# Altium PCB Thrust-Layout.PcbDoc
Units mm, origin at the board's own origin, x right, y up, seen from the top; angles counter-clockwise.
Board outline 97.1 x 65.85 mm, 2 copper layers (Top Layer, Bottom Layer); 48 components, 32 nets, 163 pads, 107 vias.
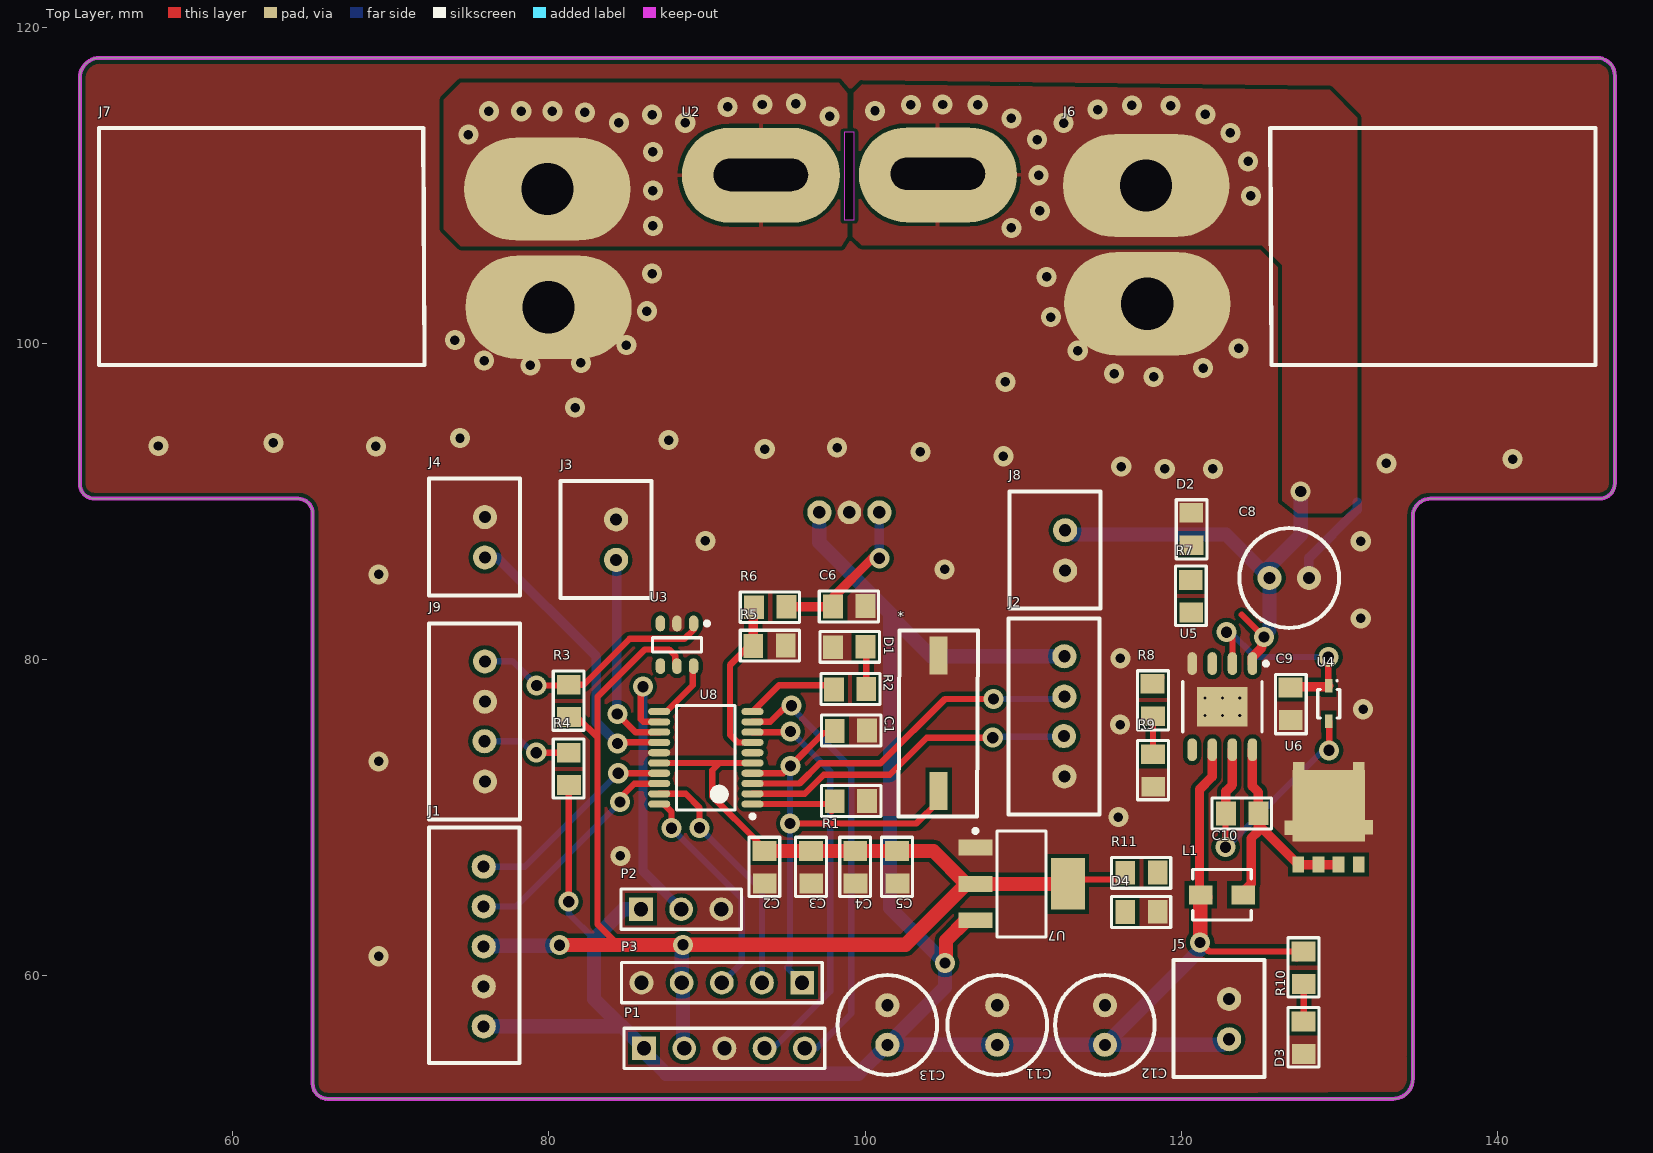
[diagram p0: Top Layer view]
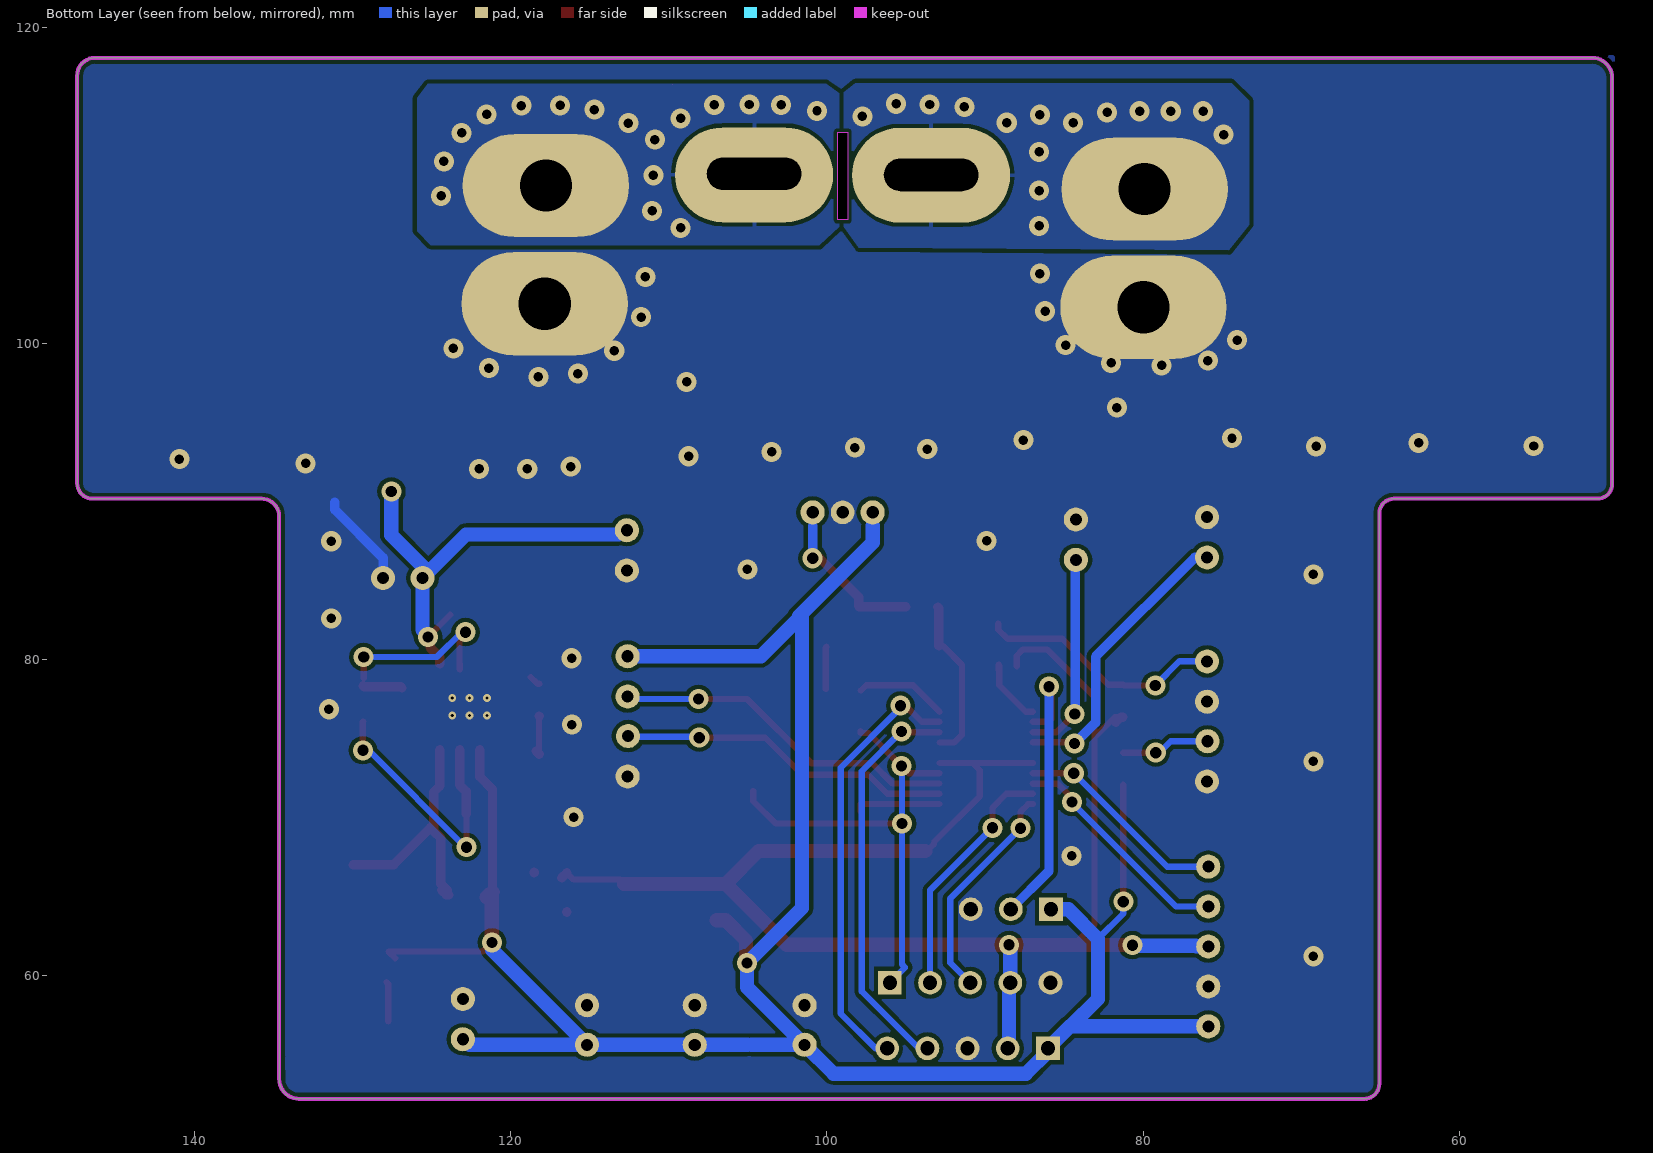
[diagram p1: Bottom Layer view, seen from below]

## Layer stack, top to bottom
Top Solder: solder mask 0.0102, Solder Resist, Dk 3.5
Top Layer: signal copper 0.0356
Dielectric 1: dielectric 0.32, FR-4, Dk 4.8
Bottom Layer: signal copper 0.0356
Bottom Solder: solder mask 0.0102, Solder Resist, Dk 3.5

## Board outline
65.05,53.175 ccw(c66.025,53.175) 66.025,52.2 133.38,52.2 ccw(c133.38,53.47) 134.65,53.47 134.65,54.918 ccw(c134.64,54.918) 134.64,54.928 134.64,89.04 cw(c135.765,89.04) 135.765,90.165 146.44,90.165 ccw(c146.44,91.15) 147.425,91.15 147.425,116.925 ccw(c146.3,116.925) 146.3,118.05 51.595,118.05 ccw(c51.595,116.78) 50.325,116.78 50.325,91.1 ccw(c51.26,91.1) 51.26,90.165 64.135,90.165 cw(c64.135,89.25) 65.05,89.25
cut-out: 98.675,113.342 98.675,107.808 99.325,107.808 99.325,113.342
cut-out: 109.75,116.35

## Design rules (kind name [scope] priority, off if disabled: settings)
Clearance [All] p1: gap=0.254 ignorepadtopadclearanceinfootprint=FALSE except(0: Arc-Hole Track-Hole SMDPad-Hole THPad-Hole Via-Hole Fill-Hole Poly-Hole Region-Hole Text-Hole)
DiffPairsRouting DiffPairsRouting_1 [All] p1: maxlimit=0.254 minlimit=0.254 mostfreqgap=0.254 toplayer_minwidth=0.381 toplayer_maxwidth=0.381 toplayer_prefwidth=0.381 bottomlayer_minwidth=0.381 bottomlayer_maxwidth=0.381 bottomlayer_prefwidth=0.381 maxuncoupledlength=12.7
DiffPairsRouting [All] p2: maxlimit=0.254 minlimit=0.254 mostfreqgap=0.254 toplayer_minwidth=0.381 toplayer_maxwidth=0.381 toplayer_prefwidth=0.381 bottomlayer_minwidth=0.381 bottomlayer_maxwidth=0.381 bottomlayer_prefwidth=0.381 maxuncoupledlength=12.7
PlaneConnect [All] p1: planeconnectstyle=Direct reliefexpansion=0.508 reliefentries=4 reliefconductorwidth=0.254 reliefairgap=0.254
PolygonConnect [All] p1: connectstyle=Direct reliefconductorwidth=0.254 reliefentries=4 polygonreliefangle="90 Angle" airgapwidth=0.254
PolygonConnect PolygonConnect_2 [All vs IsNamedPolygon('Top Layer-IP-')] p2: thpad.connectstyle=Direct thpad.reliefconductorwidth=0.254 thpad.reliefentries=4 thpad.polygonreliefangle="90 Angle" thpad.airgapwidth=0.254 smdpad.connectstyle=Relief smdpad.reliefconductorwidth=0.254 smdpad.reliefentries=4 smdpad.polygonreliefangle="90 Angle" smdpad.airgapwidth=0.254 via.connectstyle=Direct via.reliefconductorwidth=0.254 via.reliefentries=4 via.polygonreliefangle="90 Angle" via.airgapwidth=0.254
PolygonConnect PolygonConnect_1 [All vs IsNamedPolygon('IP-_L02_P020')] p3: thpad.connectstyle=Direct thpad.reliefconductorwidth=0.254 thpad.reliefentries=4 thpad.polygonreliefangle="90 Angle" thpad.airgapwidth=0.254 smdpad.connectstyle=Relief smdpad.reliefconductorwidth=0.254 smdpad.reliefentries=4 smdpad.polygonreliefangle="90 Angle" smdpad.airgapwidth=0.254 via.connectstyle=Direct via.reliefconductorwidth=0.254 via.reliefentries=4 via.polygonreliefangle="90 Angle" via.airgapwidth=0.254
RoutingVias [All] p1: holewidth=0.711 width=1.27 viastyle="Through Hole" minholewidth=0.711 minwidth=1.27 maxholewidth=0.711 maxwidth=1.27
SolderMaskExpansion [All] p1: expansion=0.102
Width [All] p1: maxlimit=1.5 minlimit=0.254 preferedwidth=0.4 minimp=50.000000 maximp=50.000000 favimp=50.000000
28 further rules are at their usual default settings.

## Components (designator, comment, footprint, x,y, rotation, side; value= is the part's Value field where it differs from the comment)
* "SWITCH" SWITCH 104.65,75.95 r270 top
C1 "470nF" RES0805 99.1,75.425 r180 top
C2 "1uF" RES0805 93.704,66.85 r270 top
C3 "100nF" RES0805 96.648,66.85 r270 top
C4 "10nF" RES0805 99.442,66.85 r270 top
C5 "1nF" RES0805 102.092,66.85 r270 top
C6 "100nF" RES0805 99,83.425 r0 top
C8 "10uF" CAP_THT 126.85,85.175 r0 top
C9 "100nF" RES0805 126.854,77.196 r90 top
C10 "100nF" RES0805 123.85,70.325 r0 top
C11 "10uF" CAP_THT 108.334,56.9 r90 top
C12 "10uF" CAP_THT 115.142,56.9 r90 top
C13 "10uF" CAP_THT 101.383,56.9 r90 top
D1 "LED0805" RES0805 99,80.725 r180 top
D2 "LED0805" RES0805 120.575,88.254 r90 top
D3 "LED0805" RES0805 127.8,56.075 r270 top
D4 "LED0805" RES0805 117.479,64.098 r0 top
J1 "I2C" JST_XH_A_5 75.875,61.867 r0 top
J2 "JST_XH_A_4" JST_XH_A_4 112.6,76.4 r0 top
J3 "JST_XH_A_2" JST_XH_A_2 84.25,87.225 r0 top
J4 "JST_XH_A_2" JST_XH_A_2 75.95,87.375 r0 top
J5 "JST_XH_A_2" JST_XH_A_2 123.025,56.9 r0 top
J6 "XT60" XT60 117.85,102.5 r180 top
J7 "XT60" XT60 79.9,109.75 r0 top
J8 "JST_XH_A_2" JST_XH_A_2 112.65,86.546 r0 top
J9 "JST_XH_A_4" JST_XH_A_4 75.95,76.075 r0 top
L1 "INDUCTOR" IND-IHLP-1212BZ-11 122.572,65.113 r180 top
P1 "UART_MATLAB" HDR1X5 86.02,55.4 r0 top
P2 "ESC" HDR1X3 85.825,64.2 r0 top
P3 "STM32_PROG" HDR1X5 96.015,59.55 r180 top
R1 "10K" RES0805 99.1,70.975 r180 top
R2 "860R" RES0805 99.05,78.05 r180 top
R3 "10K" RES0805 81.325,77.375 r270 top
R4 "220R" RES0805 81.325,73.075 r270 top
R5 "560R" RES0805 93.95,80.8 r180 top
R6 "560R" RES0805 94,83.375 r0 top
R7 "860R" RES0805 120.675,84 r270 top
R8 "860R" RES0805 118.129,77.431 r90 top
R9 "860R" RES0805 118.279,72.977 r270 top
R10 "860R" RES0805 127.8,60.5 r270 top
R11 "860R" RES0805 117.481,66.577 r0 top
U2 "ACS770" ACS770 99.002,89.3 r0 top
U3 "NL27WZ14" TSOP6 88.1,80.925 r270 top
U4 "DIODE-SOD323" SODFL250X100-2N 129.326,77.203 r270 top
U5 "NVC891330" SOIC8 122.595,77.011 r270 top
U6 "DIODE-NRVB440" MBR440 129.325,70.775 r180 top
U7 "AMS1117" SOT223 109.9,65.8 r0 top
U8 "STM32F030" TSOP20 89.925,73.775 r180 top

## Footprints (in the part's own frame and the unit in brackets; to place one, negate y for a bottom-side part, rotate by r counter-clockwise, add the part's x,y. Pads: shape width x height; smd on the part's side, far side on the other; paste and mask are expansions set on the pad)
ACS770 [mm]
  round 1.524 hole 0.8: 1(-1.9,0) 3(1.9,0)
  round 1.5 hole 0.8: 2(0,0)
  rrect100% 10x6 smd: 4(5.6,21.35) 5(-5.6,21.325)
  rrect100% 10x6 smd far side: 4(5.6,21.35) 5(-5.6,21.325)
  rrect100% 5.97x2.043 hole 2.043 slot 5.97 at 0 deg: 4(5.6,21.42) 5(-5.6,21.35)
CAP_THT [mil]
  round 60 hole 30: 1(-50.2,-0.98) 2(48.23,-0.98)
  silkscreen extent -125,-125 123,123
HDR1X3 [mm] "Connector; Header; 3 Position"
  rect 1.5x1.5 hole 0.9: 1(0,0)
  round 1.5 hole 0.9: 2(2.54,0) 3(5.08,0)
  silkscreen extent -1.27,-1.27 6.35,1.27
HDR1X5 [mm] "Connector; Header; 5 Position"
  rect 1.5x1.5 hole 0.9: 1(0,0)
  round 1.5 hole 0.9: 2(2.54,0) 3(5.08,0) 4(7.62,0) 5(10.16,0)
  silkscreen extent -1.27,-1.27 11.43,1.27
IND-IHLP-1212BZ-11 [mm] "Molded Inductor, 2-Leads, Body 3.33x3.00mm, IPC Medium Density"
  rect 1.5x1.2 smd: 1(-1.35,0) 2(1.35,0)
  silkscreen extent -1.85,-1.6 1.85,1.6, body extent -2.04,-1.6 2.04,1.6, height 2
JST_XH_A_2 [mil]
  round 60 hole 30: 1(0,63.98) 2(0,-36.42)
  silkscreen extent -139,-131 88,160
JST_XH_A_4 [mil]
  round 60 hole 30: 1(0,149.61) 2(0,49.21) 3(-0.98,-49.21) 4(0,-149.61)
  silkscreen extent -139,-244 88,244
JST_XH_A_5 [mil]
  round 60 hole 30: 1(0,197.83) 2(0,98.43) 3(0,-0.98) 4(0,-100.39) 5(0,-199.8)
  silkscreen extent -137,-291 90,295
MBR440 [mm]
  rect 0.75x1 smd: 1(1.925,3.75) 2(0.65,3.75) 3(-0.625,3.75) 4(-1.9,3.75)
  rect 0.524x0.905 smd: 5(-2.525,1.4) 5(2.525,1.425)
  rect 0.75x0.5 smd: 5(-1.9,-2.475) 6(1.9,-2.475)
  rect 4.56x4.53 smd: 5(0,0.025)
RES0805 [mm]
  rect 1.25x1.5 smd: 1(-1.025,-0.075) 2(1.025,-0.05)
  silkscreen extent -1.9,-1.05 1.85,0.9
SODFL250X100-2N [mm] "SODFL, 2-Leads, Body 1.25x2.50mm, IPC Medium Density"
  rect 0.85x0.45 smd: 1(-1.125,0) 2(1.125,0)
  silkscreen extent -1.5,-0.7 0.9,0.7, body extent -1.25,-0.67 1.25,0.67, height 1
SOIC8 [mm] "SOIC, 8-Leads, Body 4.90x3.90mm, Pitch 1.27mm, Thermal Pad 3.20x2.51mm, IPC Medium Density"
  oval 1.45x0.6 smd: 1(-2.725,1.905) 2(-2.725,0.635) 3(-2.725,-0.635) 4(-2.725,-1.905) 5(2.725,-1.905) 6(2.725,-0.635) 7(2.725,0.635) 8(2.725,1.905)
  rect 2.51x3.2 smd: 4(0,0)
  silkscreen extent -2.85,-2.5 1.6,2.88, body extent -3,-2.5 3,2.5, height 1.75
SOT223 [mm] "SOT223, 4-Leads, Body 6.50x7.00mm (avg), Pitch 2.30mm, IPC Medium Density"
  rect 2.15x1 smd: 1(-2.925,2.3) 2(-2.925,0) 3(-2.925,-2.3)
  rect 2.15x3.25 smd: 2(2.925,0)
  silkscreen extent -3.05,-3.35 1.55,3.47, body extent -3.5,-3.35 3.5,3.35, height 1.8
SWITCH [mm]
  rect 2.43x1.14 smd: 1(-4.3,0) 2(4.275,0)
  silkscreen extent -5.87,-2.55 5.87,2.5
TSOP6 [mm] "TSOP, 6-Leads, Body 3.00x1.50mm, Pitch 1.05mm, IPC Medium Density"
  oval 1x0.6 smd: 1(-1.35,1.05) 2(-1.35,0) 3(-1.35,-1.05) 4(1.35,-1.05) 5(1.35,0) 6(1.35,1.05)
  silkscreen extent -1.47,-1.55 0.45,2.03, body extent -1.38,-1.55 1.38,1.55, height 1.1
TSOP20 [mm] "TSOP, 20-Leads, Body 6.50x4.40mm, Pitch 0.65mm, IPC Medium Density"
  oval 1.4x0.45 smd: 1(-2.95,2.925) 2(-2.95,2.275) 3(-2.95,1.625) 4(-2.95,0.975) 5(-2.95,0.325) 6(-2.95,-0.325) 7(-2.95,-0.975) 8(-2.95,-1.625) 9(-2.95,-2.275) 10(-2.95,-2.925) 11(2.95,-2.925) 12(2.95,-2.275) 13(2.95,-1.625) 14(2.95,-0.975) 15(2.95,-0.325) 16(2.95,0.325) 17(2.95,0.975) 18(2.95,1.625) 19(2.95,2.275) 20(2.95,2.925)
  silkscreen extent -3.08,-3.3 1.85,3.82, body extent -3.9,-3.55 3.9,3.55, height 1.2
XT60 [mm]
  rrect100% 10.524x6.524 smd: 1(0,0) 2(0.075,-7.475)
  round 1.524 hole 3.3: 1(0,0) 2(0.075,-7.475)
  rrect100% 10.524x6.524 smd far side: 1(0,0) 2(0.075,-7.475)
  silkscreen extent -28.35,-11.12 -7.77,3.88

## Part data
C1 C2 C3 C4 C5 C6 C9 C10: library part CAP0805
C8 C11 C12 C13: library part CAP_THT
J1: library part JST_XH_A_5
L1: "IHLP-1212BZ-11"
P1 P3: library part "Header 5", "Header, 5-Pin", LatestRevisionDate=17-Jul-2002, LatestRevisionNote="Re-released for DXP Platform.", Publisher="Altium Limited"
P2: library part "Header 3", "Header, 3-Pin", LatestRevisionDate=17-Jul-2002, LatestRevisionNote="Re-released for DXP Platform.", Publisher="Altium Limited"
R1 R2 R3 R4 R5 R6 R7 R8 R9 R10 R11: library part RES0805

## Via types
v1: diameter 1.27, hole 0.6, Top Layer to Bottom Layer, 74 vias
v2: diameter 1.27, hole 0.711, Top Layer to Bottom Layer, 27 vias
v3: diameter 0.5, hole 0.2, Top Layer to Bottom Layer, 6 vias

## Nets (pads, with @x,y where several pads share a name; then routed paths per layer and width w, separated by ;. In a path a pad name is that pad's centre, name@x,y a point inside that pad or via, vN(x,y) a via of type N, cw(c..) or ccw(c..) an arc to the next point about the centre after c; other vN are vias at no path point)
3.3V: C2.1 C3.1 C4.1 C5.1 J1.3 P1.2 P3.4 R3.2 R11.1 U3.5 U7.2 U8.5 U8.16 | length 101.5
  Top Layer w0.4: R3.2@81.338,76.35 81.4,76.35 81.8,76.35 83.075,75.075 ; 84.388,61.938 83.075,63.25 83.075,75.075 ; U8.16 90.782,73.45 ; U3.5@88,79.575 88,80.225 87.6,80.625 86.05,80.625 83.075,77.65 83.075,75.075 ; U8.5 90.782,73.45 ; C2.1@93.779,67.875 93.654,67.875 93.229,68.3 93.229,68.425 90.325,71.329 90.325,72.993 90.782,73.45 ; U7.2@112.825,65.8 113.102,66.077 116.031,66.077 R11.1
  Top Layer w0.6: R3.2 R3.2@81.338,76.35 ; R3.2@81.4,76.35 R3.2@81.725,76.025 ; R11.1 R11.1@116.781,66.177
  Top Layer w0.9: v2(80.675,61.925) 80.688,61.938 84.388,61.938 88.463,61.938 v2(88.475,61.95) 102.55,61.95 U7.2@106.4,65.8 ; C2.1@93.779,67.875 C3.1 C4.1 C5.1 104.325,67.875 U7.2@106.4,65.8 ; U7.2@112.825,65.8 106.975,65.8 U7.2@106.4,65.8
  Bottom Layer w0.9: J1.3@76.625,61.842 76.667,61.883 80.633,61.883 v2(80.675,61.925) ; v2(88.475,61.95) 88.395,61.87 P3.4 88.477,59.468 88.477,55.482 P1.2
5V: C11.1 C12.1 C13.1 J1.5 J2.1 J5.2 L1.2 P1.1 P2.1 R4.2 R10.1 U2.1 U5.6 U7.3 | length 151.7
  Top Layer w0.4: v2(81.25,64.675) R4.2@81.25,72.075 ; v2(121.175,62.1) 121.75,61.525 R10.1 R10.1@127.3,61.1
  Top Layer w0.6: L1.2@121.012,65.334 L1.2@121.091,65.413 ; L1.2@121.234,65.113 L1.2 121.175,65.113 121.012,65.275 120.983,65.305 121.006,65.328 121.15,65.472 121.15,71.775 121.96,72.585 U5.6
  Top Layer w0.9: v2(105.05,60.8) 105.121,60.871 105.121,62.221 106.4,63.5 U7.3 ; v2(121.175,62.1) 121.198,62.123 121.198,65.089 L1.2 ; L1.2@121.234,65.113 121.372,65.113 L1.2@121.522,64.963
  Bottom Layer w0.4: v2(81.25,64.675) 81.25,63.925 82.85,62.325
  Bottom Layer w0.9: J1.5@76.625,56.792 84.583,56.792 ; P2.1 84.725,64.2 82.85,62.325 82.85,58.525 84.583,56.792 ; 97.102,88.445 97.102,87.398 101.75,82.75 ; 104.775,55.625 C13.1 ; 105.05,55.625 C11.1 C12.1 ; J2.1 104.175,80.2 101.575,82.8 101.575,64.275 v2(105.05,60.8) 105.05,59.266 C13.1 ; v2(121.175,62.1) 121.175,61.633 C12.1 ; J5.2@122.606,55.625 C12.1 ; J5.2@123.15,56 J5.2@123.269,56.119 ; 84.583,56.792 84.628,56.792 P1.1 86.02,55.18 87.4,53.8 99.584,53.8 C13.1
11.1V: C8.1 J6.2 J8.1 R7.2 R8.2 U2.4 U5.1 | length 33.2
  Top Layer w0.4: R8.2 118.304,78.456 R8.2@118.729,78.881 ; 123.82,82.825 125.22,81.425 v2(125.225,81.425)
  Top Layer w0.6: U5.1 124.5,80.161 125.097,80.758 125.097,81.297 v2(125.225,81.425)
  Top Layer w0.9: J6.2@117.775,109.525 117.987,109.313 J6.2@121.762,109.313
  Bottom Layer w0.9: J8.1@112.65,88.425 113.175,87.9 122.825,87.9 C8.1 ; v2(125.225,81.425) 125.225,81.525 125.575,81.875 C8.1 ; v2(127.55,90.625) 127.55,87.875 125.575,85.9 C8.1
  other v1: 109.25,107.3 111.05,108.375 124.4,109.325 110.975,110.625 124.225,111.5 110.875,112.875 123.1,113.3 112.55,113.925 109.25,114.225 121.525,114.475 100.625,114.7 114.7,114.775 119.325,115.025 116.875,115.05 102.9,115.075 104.9,115.1 107.125,115.075
ADC_IN: R5.2 R6.1 U8.7 | length 10.5
  Top Layer w0.4: U8.7 91.925,74.75 91.45,75.225 91.45,79.65 92.65,80.85 R5.2
  Top Layer w0.6: R5.2 92.925,83.25 R6.1
BOOT0: R1.2 U8.1 | length 5.5
  Top Layer w0.4: U8.1 97.875,70.85 R1.2@97.875,70.4
BST: C10.1 U4.2 U5.7 | length 17.3
  Top Layer w0.4: v2(122.8,68.125) 122.8,70.225 C10.1 ; U4.2 129.351,76.053 129.351,74.258 v2(129.345,74.252)
  Top Layer w0.6: C10.1 122.825,71.655 123.23,72.06 U5.7
  Bottom Layer w0.4: v2(122.8,68.125) 122.863,68.125 128.982,74.245 v2@129.345,74.245
DATA_IN: J2.2 U8.3 | length 22
  Top Layer w0.4: U8.3 95.85,72.15 97.125,73.425 100.975,73.425 105.05,77.5 v2(108.125,77.5)
  Bottom Layer w0.4: v2(108.125,77.5) 112.45,77.5 J2.2
DRV: C9.2 U4.1 U5.2 | length 13.5
  Top Layer w0.4: v2(122.85,81.725) 123.24,81.335 123.24,79.746 U5.2 U5.2@123.23,79.365 ; 129.3,78.811 v2(129.3,80.15) ; U4.1 129.326,78.343 U4.1@129.351,78.368
  Top Layer w0.6: C9.2 126.954,78.271 129.276,78.271 U4.1@129.326,78.321
  Bottom Layer w0.4: v2(122.85,81.725) 123.1,81.725 124.675,80.15 v2(129.3,80.15)
GND: *.1 C1.1 C2.2 C3.2 C4.2 C5.2 C6.2 C8.2 C9.1 C11.2 C12.2 C13.2 D1.2 D2.2 D3.2 D4.2 J1.4 J2.4 J3.1 J4.1 J5.1 J6.1 J7.2 J8.2 J9.2 J9.4 P1.3 P2.3 P3.5 R1.1 R5.1 R9.2 U2.2 U3.2 U5.4 U6.5 U6.6 U7.1 U8.15 | length 6.1
  Bottom Layer w0.6: C8.2 128.075,86.425 131.125,89.475 131.125,89.95
  other v1: 69.225,61.225 84.525,67.575 116.025,70.025 69.225,73.55 116.125,75.875 131.5,76.85 116.15,80.075 131.35,82.6 69.225,85.375 105.025,85.7 131.35,87.475 89.9,87.5 118.95,92.05 122,92.05 116.2,92.2 132.975,92.4 140.95,92.675 108.75,92.85 103.5,93.125 93.65,93.3 98.225,93.4 69.05,93.475 55.3,93.5 62.575,93.7 87.575,93.875 74.375,94 81.65,95.925 108.875,97.55 118.25,97.875 115.75,98.075 121.375,98.425 78.825,98.6 82.025,98.75 75.9,98.9 113.45,99.525 123.625,99.675 84.9,99.875 74.05,100.2 111.75,101.65 86.2,102.025 111.475,104.2 86.525,104.4
  other v3: 121.495,76.461 122.595,76.461 123.695,76.461 121.495,77.561 122.595,77.561 123.695,77.561
IP-: J7.1 U2.5 | length 0.7
  Top Layer w0.6: U2.5@92.725,110.625 U2.5@93.402,110.625
  other v1: 86.575,107.425 86.575,109.65 86.575,112.1 74.9,113.2 84.425,113.948 88.623,113.948 97.75,114.35 86.525,114.45 82.275,114.6 76.2,114.675 78.25,114.675 80.225,114.675 91.3,114.95 93.5,115.1 95.625,115.15
IR_LED_IN: J9.1 R3.1 U3.1 | length 15.7
  Top Layer w0.4: v2(79.225,78.35) 81.2,78.35 R3.1 82.2,78.4 85.1,81.3 88.575,81.3 89.15,81.875 U3.1
  Bottom Layer w0.4: J9.1 77.7,79.875 v2(79.225,78.35)
IR_LED_OUT: U3.6 U8.11 | length 4.4
  Top Layer w0.4: U8.11 87.425,76.7 89.1,78.375 89.1,79.575 U3.6@89.125,79.575 ; U3.6@89.125,79.3 U3.6@89.125,79.575 ; U3.6@89.125,79.675 U3.6@89.125,79.575
NetC6_1: C6.1 R6.2 U2.3 | length 9.5
  Top Layer w0.6: R6.2 95.037,83.337 97.963,83.337 C6.1 97.975,83.925 100.45,86.4 v2(100.9,86.4)
  Bottom Layer w0.6: v2(100.9,86.4) 100.901,86.401 100.901,88.444 100.902,88.445
NetC10_2: C10.2 L1.1 U5.8 U6.1 U6.2 U6.3 | length 16.4
  Top Layer w0.6: L1.1 124.072,65.113 124.372,65.413 124.012,65.413 124.425,65.825 124.425,68.7 124.875,69.15 ; U5.8 124.5,71.975 124.875,71.6 C10.2 124.875,69.15 ; U6.3 U6.2 U6.1 125.075,69.35 124.875,69.15
NetD1_1: D1.1 R2.1 | length 2.7
  Top Layer w0.4: D1.1 100.075,80.75 R2.1
NetD2_1: D2.1 R7.1
NetD3_1: D3.1 R10.2 | length 2.5
  Top Layer w0.4: D3.1 127.75,57.125 R10.2 R10.2@127.85,59.575
NetD4_1: D4.1 R11.2 | length 0
  Top Layer w0.6: D4.1@116.442,64.036 D4.1 ; R11.2 R11.2@118.518,66.514
NetJ9_3: J9.3 R4.1 | length 5.6
  Top Layer w0.4: v2(79.2,74.1) R4.1
  Bottom Layer w0.4: J9.3 78.24,74.825 78.965,74.1 v2(79.2,74.1)
NetR8_1: R8.1 R9.1 U5.5 | length 2.7
  Top Layer w0.4: R9.1 R8.1
  Top Layer w0.6: R9.1 R9.1@118.392,74.19
NRST: *.2 C1.2 P3.1 U8.4 | length 31
  Top Layer w0.4: U8.4 94.823,72.8 v2(95.279,73.256) 97.373,75.35 97.875,75.35 C1.2@97.875,75.475 ; v2(95.25,69.619) 103.239,69.619 104.65,71.03 *.2
  Bottom Layer w0.4: v2(95.279,73.256) 95.25,73.227 v2(95.25,69.619) 95.25,60.715 95.065,60.53 95.065,60.5 P3.1
PULL_DOWN0: J3.2 U8.13 | length 12.9
  Top Layer w0.4: v2(84.325,76.55) 85.475,75.4 U8.13
  Bottom Layer w0.4: J3.2 J3.2@84.3,86.25 ; v2@84.275,76.6 v2(84.325,76.55)
  Bottom Layer w0.6: v2@84.275,76.6 J3.2@84.275,86.275
PULL_DOWN1: J4.2 U8.14 | length 17.6
  Top Layer w0.4: v2(84.33,74.68) 84.41,74.76 86.965,74.76 U8.14
  Bottom Layer w0.6: 76.725,86.45 83,80.175 83,76.01 v2(84.33,74.68)
RX: P1.5 U8.9 | length 27.8
  Top Layer w0.4: U8.9 94,76.05 95.025,77.075 v2(95.35,77.075)
  Bottom Layer w0.4: v2(95.35,77.075) 95.35,76.925 99.125,73.15 99.125,57.6 96.925,55.4 P1.5
SCK_OUT: J2.3 U8.2 | length 21.2
  Top Layer w0.4: U8.2 96.175,71.5 97.375,72.7 101.55,72.7 103.9,75.05 v2(108.075,75.05)
  Bottom Layer w0.4: v2(108.075,75.05) 108.125,75.1 112.525,75.1 J2.3
SCL: J1.1 U8.17 | length 12.8
  Top Layer w0.4: v2(84.387,72.8) U8.17
  Bottom Layer w0.4: J1.1@76.625,66.892 78.478,66.892 v2(84.387,72.8)
SDA: J1.2 U8.18 | length 13.7
  Top Layer w0.4: v2(84.5,70.975) 84.5,71.25 85.39,72.14 86.965,72.14 U8.18
  Bottom Layer w0.4: J1.2@76.625,64.367 77.892,64.367 v2(84.5,70.975)
SWCLK: P3.3 U8.20 | length 14.2
  Top Layer w0.4: U8.20 87.262,70.85 87.75,70.362 v2(87.75,69.325)
  Bottom Layer w0.4: v2(87.75,69.325) 92.2,64.875 92.2,60.815 P3.3
SWDIO: P3.2 U8.19 | length 15.6
  Top Layer w0.4: U8.19 88.65,71.5 89.525,70.625 v2(89.525,69.35)
  Bottom Layer w0.4: v2(89.525,69.35) 93.475,65.4 P3.2
TEST_LED: R2.2 U8.10 | length 5.8
  Top Layer w0.4: U8.10 94.55,78.375 97.504,78.375 R2.2@97.85,78.029
TIM3_CH1: P2.2 U8.12 | length 18.4
  Top Layer w0.4: v2(85.95,78.275) 85.8,78.125 85.8,76.225 85.975,76.05 U8.12
  Bottom Layer w0.6: v2(85.95,78.275) 85.95,66.615 P2.2
TX: P1.4 U8.8 | length 25.6
  Top Layer w0.4: U8.8 95.25,75.4 v2(95.288,75.438)
  Bottom Layer w0.4: P1.4 94.2,55.4 97.8,59 97.8,72.925 v2(95.288,75.438)
pads on no net: U3.3 U3.4 U5.3 U6.4 U8.6

## Polygon pours and split planes (outlines as drawn)
11.1V on Top Layer "11.1V" (solid, pour order 28): 99.275,115.85 99.225,107.475 99.225,106.75 99.775,106.2 100.125,106.2 100.775,106.2 101.8,106.2 103.225,106.2 125.1,106.2 126.375,104.925 126.375,90.05 127.375,89.25 130.125,89.25 131.125,90.05 131.125,114.275 129.375,116.025 99.813,116.387
IP- on Top Layer "IP-" (solid, pour order 27): 74.425,116.475 98.325,116.475 98.875,115.825 98.875,115.625 98.875,115.075 98.875,106.725 98.5,106.15 74.425,106.15 73.35,107.225 73.35,115.4
GND on Top Layer "GND" (solid, pour order 29): 64.787,89.892 65.05,68.586 65.201,52.655 66.648,52.2 69.602,52.2 134.244,52.655 134.916,89.892 147.254,90.34 147.254,118.096 50.209,118.096 50.715,90.34
11.1V on Bottom Layer "11.1V" (solid, pour order 33): 100.025,116.4 125.233,116.4 125.925,115.525 125.925,107.075 125.05,106.2 100.475,106.2 99.225,107.375 99.225,115.825
IP- on Bottom Layer "IP-" (solid, pour order 31): 98.925,115.867 98.2,116.459 74.4,116.459 73.291,115.35 73.291,107.509 74.567,105.867 97.975,106.05 98.925,107.375
GND on Bottom Layer "GND" (solid, pour order 35): 50.496,90.597 64.861,89.807 65.05,79.011 65.05,70.372 65.223,52.621 71.025,52.621 134.214,52.621 134.868,89.846 147.254,90.34 147.254,118.225 50.154,118.225

## Keep-outs
Keep-Out Layer:
  lines w0.254: 50.325,91.1 ccw(c51.26,91.1) 51.26,90.165 64.135,90.165 cw(c64.135,89.25) 65.05,89.25 65.05,76.7 65.05,53.175 ccw(c66.025,53.175) 66.025,52.2 67.7,52.2 69.4,52.2 71.775,52.2 72.375,52.2 87.525,52.2 116.775,52.2 132.725,52.2 133.38,52.2 ccw(c133.38,53.47) 134.65,53.47 134.65,54.918 ccw(c134.64,54.918) 134.64,54.928 134.64,89.04 cw(c135.765,89.04) 135.765,90.165 146.44,90.165 ccw(c146.44,91.15) 147.425,91.15 147.425,116.925 ccw(c146.3,116.925) 146.3,118.05 51.79,118.05 51.595,118.05 ccw(c51.595,116.78) 50.325,116.78 50.325,91.1

## Other copper
Top Layer:
  pour cut-out: 74.425,116.65
  pour cut-out: 74.811,115.7